# EAGLE board PIC32DIP (EAGLE 5.11)
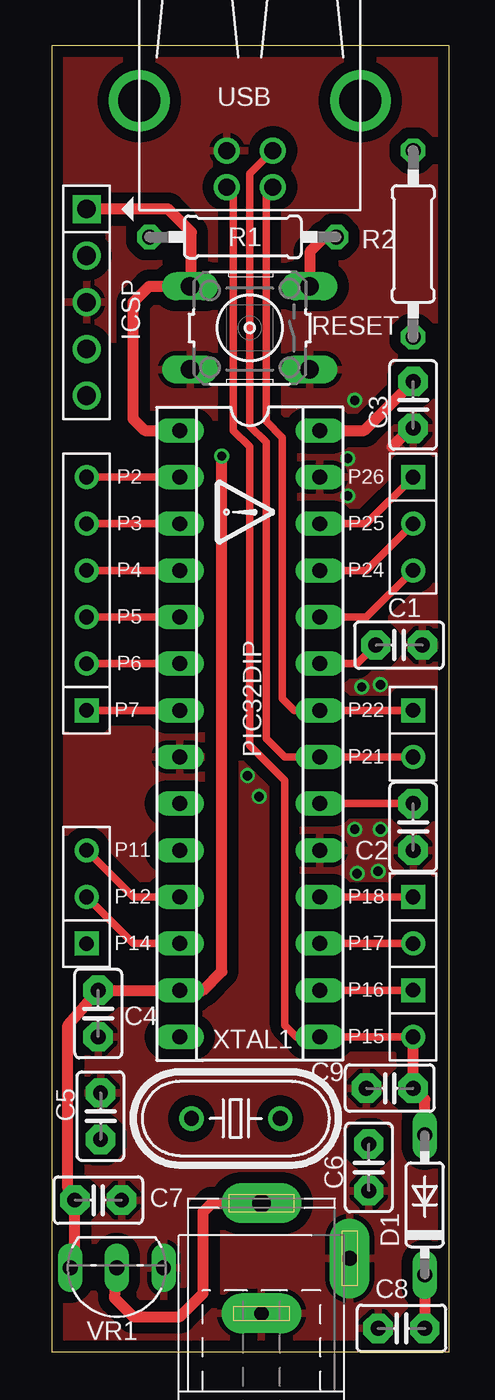
[diagram p0: board, top side]
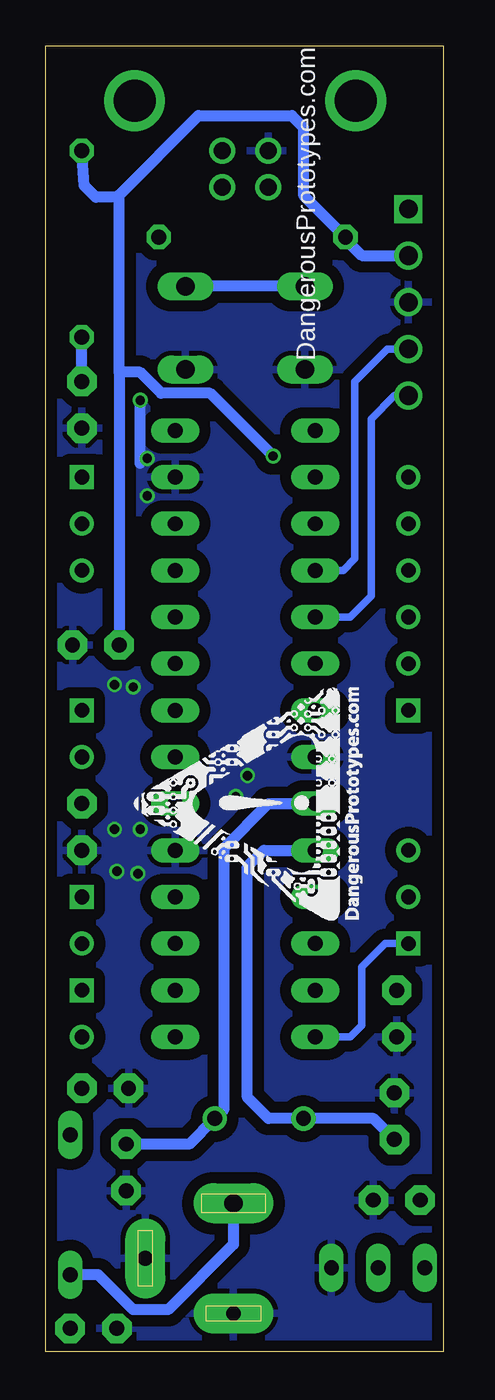
[diagram p1: board, bottom side, seen from below]

Size 21.64 x 71.11 mm. Coordinates in mm from the lower left corner, seen from the top.
Outline: 0,0 21.64,0 21.64,71.11 0,71.11 0,0
Copper layers (1*16): Top 0.035mm / dielectric 1.5mm / Bottom 0.035mm
Design rules "Fusion_eagle_rule_v1.1": minimum track width 6mil, minimum drill 12mil, track to track 6mil, track to pad 6mil, pad to pad 6mil, via to via 6mil, smd to smd 0mil, copper to edge 10mil, drill to drill 10mil, minimum pad ring 10mil, minimum via ring 6mil, stop-mask expansion 2mil, vias tented up to drill 100mil, thermal gap 10mil

## Footprints (pad centres in the part's own frame; a part is rotated, then mirrored left to right if it is on the bottom)
DEC = drill 0.813 pad 1.6 octagon: 1 -1.27,0; 2 1.27,0
DO35-7 = drill 0.813 long: A 3.81,0; C -3.81,0
HEADER_PRG_1X05_ICSP_B = drill 1.016 square: 1 -5.08,0 | drill 1.016 round: 2 -2.54,0; 3 0,0; 4 2.54,0; 5 5.08,0
SPC4077 = drill 0.8 pad 2.184 long: 1 -3,0; 2 0,-4.8 | drill 1 pad 2.184 long: 3 3,0
RTH025W = drill 0.813 octagon: 1 -5.08,0; 2 5.08,0
B3F-10XX = drill 1.016 long: 1 -3.251,2.261; 2 3.251,2.261; 3 -3.251,-2.261; 4 3.251,-2.261
SOCKET-28-3 = drill 0.813 long: 1 -16.51,-3.81; 2 -13.97,-3.81; 3 -11.43,-3.81; 4 -8.89,-3.81; 5 -6.35,-3.81; 6 -3.81,-3.81; 7 -1.27,-3.81; 8 1.27,-3.81; 9 3.81,-3.81; 10 6.35,-3.81; 11 8.89,-3.81; 12 11.43,-3.81; 13 13.97,-3.81; 14 16.51,-3.81; 15 16.51,3.81; 16 13.97,3.81; 17 11.43,3.81; 18 8.89,3.81; 19 6.35,3.81; 20 3.81,3.81; 21 1.27,3.81; 22 -1.27,3.81; 23 -3.81,3.81; 24 -6.35,3.81; 25 -8.89,3.81; 26 -11.43,3.81; 27 -13.97,3.81; 28 -16.51,3.81
M1X3 = drill 0.8 square: 1 0,0 | drill 0.8 round: 2 2.54,0; 3 5.08,0
M1X2 = drill 0.8 square: 1 -1.27,0 | drill 0.8 round: 2 1.27,0
M1X6 = drill 0.8 square: 1 0,0 | drill 0.8 round: 2 2.54,0; 3 5.08,0; 4 7.62,0; 5 10.16,0; 6 12.7,0
USB-B-H = drill 0.914 round: D+ 0,1.25; D- 1.981,1.25; GND 0,-1.25; VBUS 1.981,-1.25 | drill 2.286 round: GND@1 -2.718,6.02; GND@2 -2.718,-6.02
TO92-EBC = drill 0.813 long: B 0,-1.27; C 2.54,-1.27; E -2.54,-1.27
HC49U70 = drill 0.813 round: 1 -2.413,0; 2 2.413,0

## Placement (x,y rotation side)
C1  27pf  [DEC]  18.92,38.48 0 top
C2  27pf  [DEC]  19.68,28.57 270 top
C3  27pf  [DEC]  19.68,51.56 270 top
C4  27pf  [DEC]  2.54,18.41 270 top
C5  27pf  [DEC]  2.67,12.83 90 top
C6  27pf  [DEC]  17.27,10.03 270 top
C7  27pf  [DEC]  2.54,8.26 0 top
C8  27pf  [DEC]  19.05,1.27 180 top
C9  27pf  [DEC]  18.41,14.35 180 top
D1  1N4148DO35-7  [DO35-7]  20.32,8 90 top
ICSP  HEADER_PRG_PIC_ICSPB  [HEADER_PRG_1X05_ICSP_B]  1.91,57.15 270 top
J1  [SPC4077]  11.43,5.08 90 top
R1  [RTH025W]  10.41,60.71 180 top
R2  [RTH025W]  19.68,60.33 270 top
RESET  [B3F-10XX]  10.79,55.75 180 top
U$1  PIC32DIP  [SOCKET-28-3]  10.79,33.66 270 top
U$2  DINA4_L  [DP_LOGO]  9.53,45.72 270 top
U$3  HEADER1X3PTH  [M1X3]  19.68,47.62 270 top
U$4  HEADER1X2PTH  [M1X2]  19.68,33.66 270 top
U$5  HEADER1X6PTH  [M1X6]  1.91,34.93 90 top
U$6  HEADER1X3PTH  [M1X3]  1.91,22.22 90 top
U$7  HEADER1X2PTH  [M1X2]  19.68,23.49 270 top
U$8  HEADER1X2PTH  [M1X2]  19.68,18.41 270 top
U$9  [DP_LOGO_ART_0.5X0.5]  4.45,23.49 90 bottom
USB  USB  [USB-B-H]  10.79,65.41 270 top
VR1  MCP1701-3.3  [TO92-EBC]  3.56,3.3 180 top
XTAL1  20Mhz  [HC49U70]  10.03,12.7 0 top

## Library data of the parts
C1-C9 R1 R2 = dp_devices
D1 = diode
ICSP U$3-U$9 = DP2
J1 = con-jack; OC_FARNELL: unknown; OC_NEWARK: unknown
RESET = switch-omron; MPN: B3F-1000; OC_FARNELL: 176432; OC_NEWARK: 36M3542
U$1 VR1 = fica2
U$2 = DP2; URL2: DangerousPrototypes.com
USB = con-usb-2
XTAL1 = crystal; OC_FARNELL: unknown; OC_NEWARK: unknown

## Nets
3.3V: C1.1 C4.1 C7.1 ICSP.2 R1.2 R2.1 U$1.13 U$1.23 VR1.C
AVDD: C3.1 R2.2 U$1.28
D+: U$1.21 U$4.2 USB.D+
D-: U$1.22 U$4.1 USB.D-
DC_IN: C8.1 D1.C J1.3 VR1.B
GND: C1.2 C2.2 C3.2 C4.2 C5.2 C6.2 C7.2 C8.2 C9.2 ICSP.3 J1.1 J1.2 RESET.1 RESET.2 U$1.8 U$1.19 U$1.27 USB.GND VR1.E
N$1: U$1.2 U$5.6
N$2: U$1.3 U$5.5
N$3: U$1.6 U$5.2
N$4: U$1.7 U$5.1
N$5: U$1.11 U$6.3
N$7: U$1.12 U$6.2
N$8: U$1.14 U$6.1
N$9: U$1.16 U$8.1
N$10: U$1.17 U$7.2
N$11: U$1.18 U$7.1
N$12: U$1.26 U$3.1
N$13: U$1.25 U$3.2
N$14: U$1.24 U$3.3
OSC1: C6.1 U$1.9 XTAL1.2
OSC2: C5.1 U$1.10 XTAL1.1
PGEC: ICSP.5 U$1.5 U$5.3
PGED: ICSP.4 U$1.4 U$5.4
VBUS: C9.1 D1.A U$1.15 U$8.2 USB.VBUS
VCAP: C2.1 U$1.20
~MCLR: ICSP.1 R1.1 RESET.3 RESET.4 U$1.1

## Tracks (layer width: path | path; a pad name or v marks a point on that pad's centre or on a via)
3.3V  (via drill 0.51)
  Top 0.406: U$1.23 16.64,37.47 C1.1
  Top 0.61: v9.27,48.77 9.27,20.7 8.26,19.68 U$1.13 C4.1 0.89,17.78 0.89,8.89 1.27,8.51 C7.1 1.27,4.83 VR1.C
  Bottom 0.61: 17.65,62.99 13.34,67.31 8.26,67.31 7.62,66.67 7.62,62.99 R1.2 5.33,60.58 4.45,59.69 ICSP.2 | v9.27,48.77 12.7,52.2 15.37,52.2 16.51,53.34 17.65,53.34 | 17.65,53.34 17.65,62.99 | 17.65,62.99 17.78,62.87 18.92,62.87 19.56,63.5 R2.1 | 17.65,53.34 C1.1
AVDD
  Top 0.61: U$1.28 17.02,50.16 C3.1
  Bottom 0.61: C3.1 R2.2
D+
  Top 0.406: U$4.2 U$1.21 12.7,32.39 11.68,33.4 11.68,49.53 10.79,50.42 10.79,64.16 USB.D+
D-
  Top 0.406: U$4.1 U$1.22 13.21,34.93 12.57,35.56 12.57,49.78 11.68,50.67 11.68,63.06 USB.D-
DC_IN
  Top 0.61: D1.C C8.1 | VR1.B 3.43,2.92 4.45,1.91 6.99,1.91 8.26,3.17 8.26,7.62 8.71,8.08 J1.3
  Bottom 0.61: J1.3 11.43,5.84 14.99,2.29 16.89,2.29 18.8,4.19 D1.C
GND  (via drill 0.51)
  Top 0.305: C9.2 17.53,14.61
  Top 0.61: C3.2 19.56,50.29 18.54,49.28
  Bottom 0.61: 16.51,48.39 v16.51,51.82
  other vias: 10.67,31.37 11.3,30.23 16.64,26.04 16.51,28.45 17.91,28.45 17.78,26.16 16.89,36.2 17.91,36.32 16.13,48.64 16.13,46.61
  pour Top (isolate 0.61): 0,71.12 21.59,71.12 21.59,0 0,0
  pour Bottom (isolate 0.61): 0,71.12 21.59,71.12 21.59,0 0,0
N$1
  Top 0.406: U$5.6 U$1.2
N$2
  Top 0.406: U$5.5 U$1.3
N$3
  Top 0.406: U$5.2 U$1.6
N$4
  Top 0.406: U$5.1 U$1.7
N$5
  Top 0.406: U$6.3 4.45,24.76 U$1.11
N$7
  Top 0.406: U$6.2 4.45,22.22 U$1.12
N$8
  Bottom 0.406: U$6.1 3.17,22.22 4.45,20.95 4.45,17.78 5.08,17.14 U$1.14
N$9
  Top 0.406: U$1.16 U$8.1
N$10
  Top 0.406: U$1.17 U$7.2
N$11
  Top 0.406: U$1.18 U$7.1
N$12
  Top 0.406: U$1.26 17.14,45.09 U$3.1
N$13
  Top 0.406: U$1.25 17.14,42.55 U$3.2
N$14
  Top 0.406: U$1.24 17.14,40.01 U$3.3
OSC1
  Bottom 0.61: U$1.9 9.53,29.84 11.94,27.43 11.94,13.21 XTAL1.2 13.84,11.3 C6.1
OSC2
  Bottom 0.61: U$1.10 9.78,27.3 10.67,26.42 10.67,13.84 9.53,12.7 XTAL1.1 3.81,12.7 C5.1
PGEC
  Top 0.406: U$5.3 U$1.5
  Bottom 0.406: U$1.5 5.08,40.01 3.94,41.15 3.94,50.8 2.67,52.07 ICSP.5
PGED
  Top 0.406: U$5.4 U$1.4
  Bottom 0.406: U$1.4 5.46,42.55 4.83,43.18 4.83,52.83 3.05,54.61 ICSP.4
VBUS
  Top 0.406: USB.VBUS 9.91,63.06 9.91,50.16 10.79,49.28 10.79,33.02 12.7,31.11 12.7,17.78 13.34,17.14 U$1.15 U$8.2
  Top 0.61: D1.A 20.32,13.72 C9.1 U$8.2
VCAP
  Top 0.406: U$1.20 C2.1
~MCLR
  Top 0.61: U$1.1 5.08,50.16 4.45,50.8 4.45,57.15 5.31,58.01 RESET.4 7.62,58.6 7.62,60.96 6.35,62.23 ICSP.1 | R1.1 14.86,60.71 14.1,59.94 14.1,58.57 RESET.3
  Bottom 0.61: RESET.4 RESET.3

## Text on the board
tNames: P2 | P26 | P3 | P25 | P4 | P24 | P5 | P6 | P7 | P22 | PIC32DIP | P21 | P11 | P12 | P18 | P14 | P17 | P16 | P15 | VR1
bNames: DangerousPrototypes.com